# Altium PCB ESC_dev_board.PcbDoc
Units mil, origin at the board's own origin, x right, y up, seen from the top; angles counter-clockwise.
Board outline 2710 x 3135 mil, 2 copper layers (Top Layer, Bottom Layer); 51 components, 47 nets, 198 pads, 138 vias.
Unrouted connection lines stored in the file: 1.
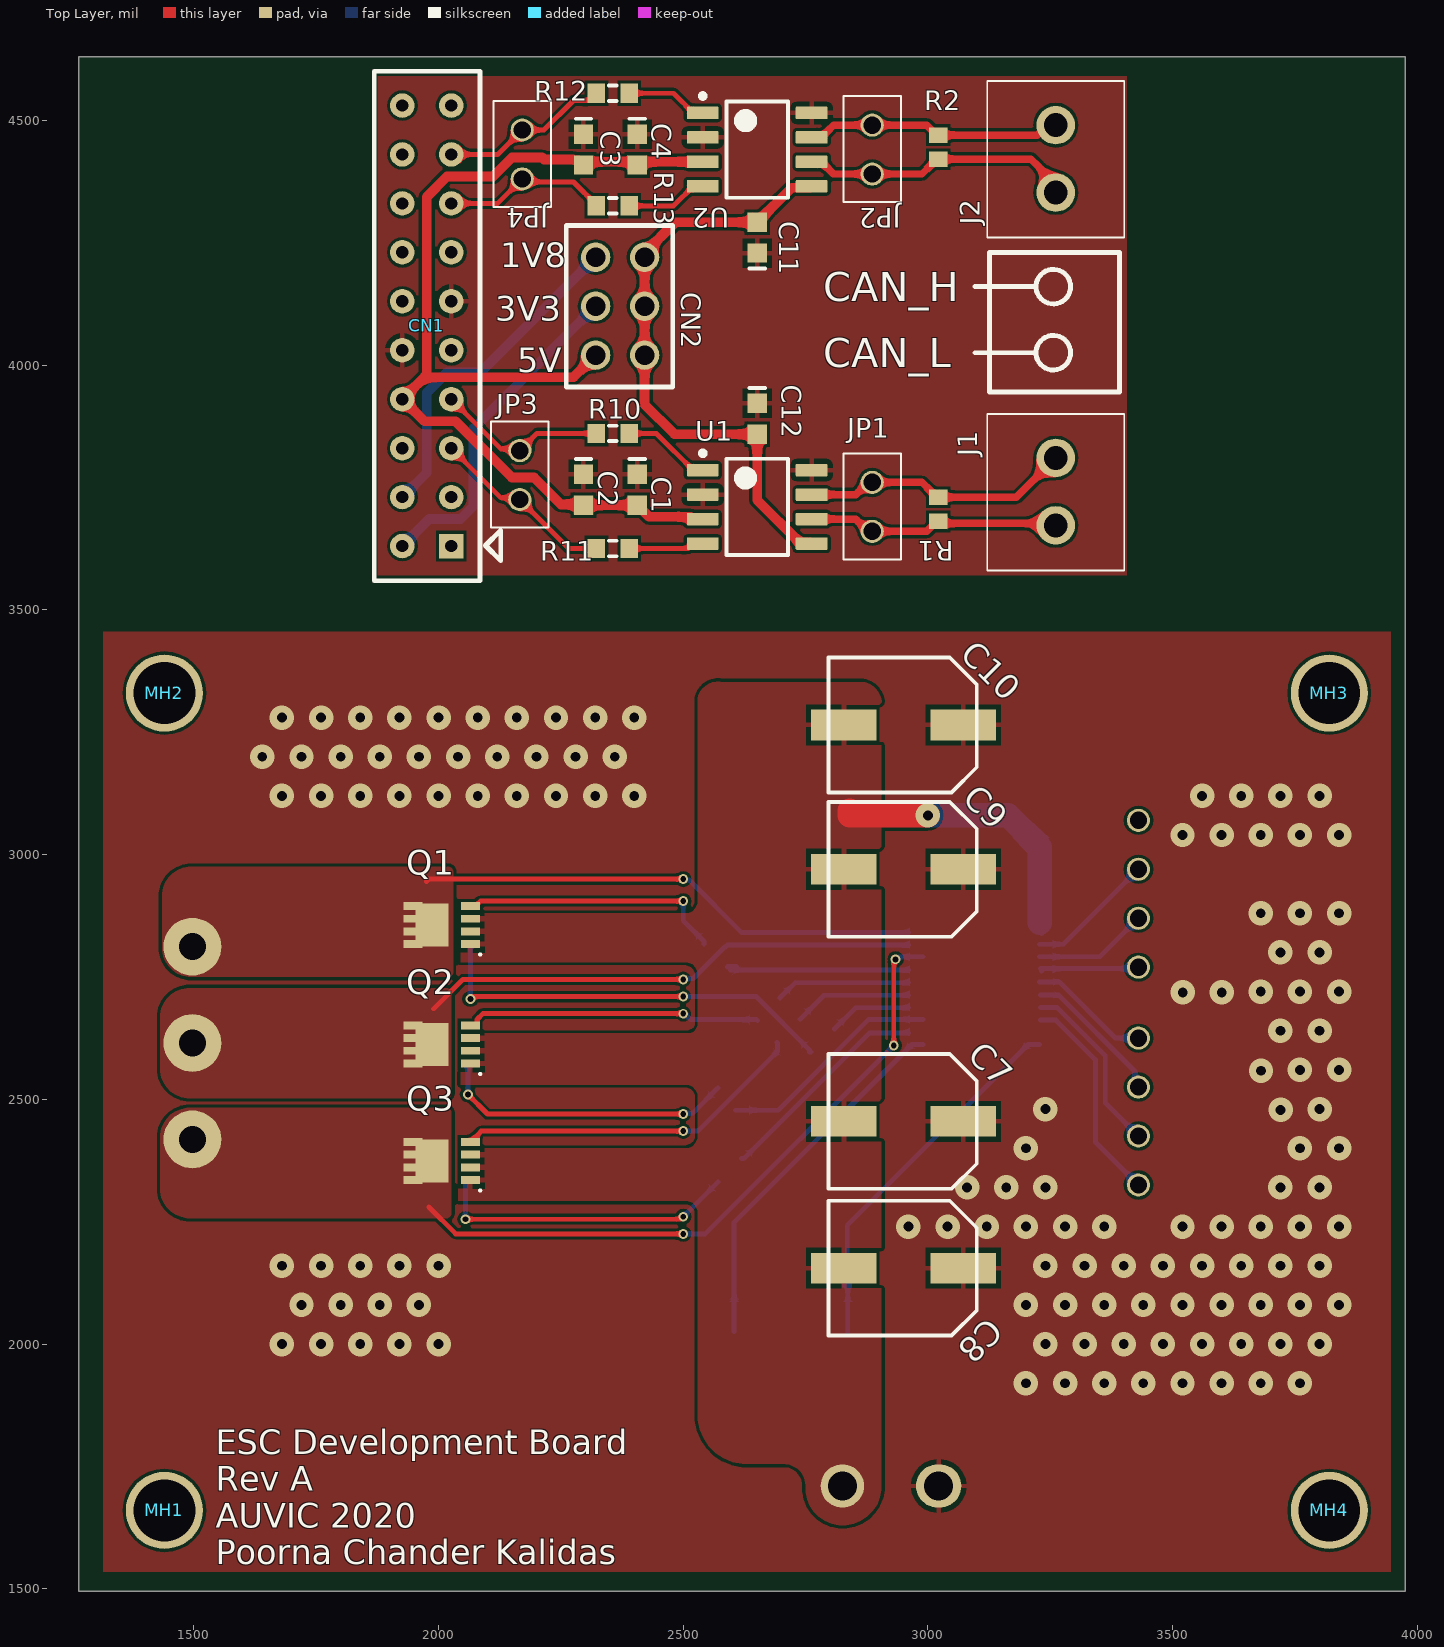
[diagram p0: Top Layer view]
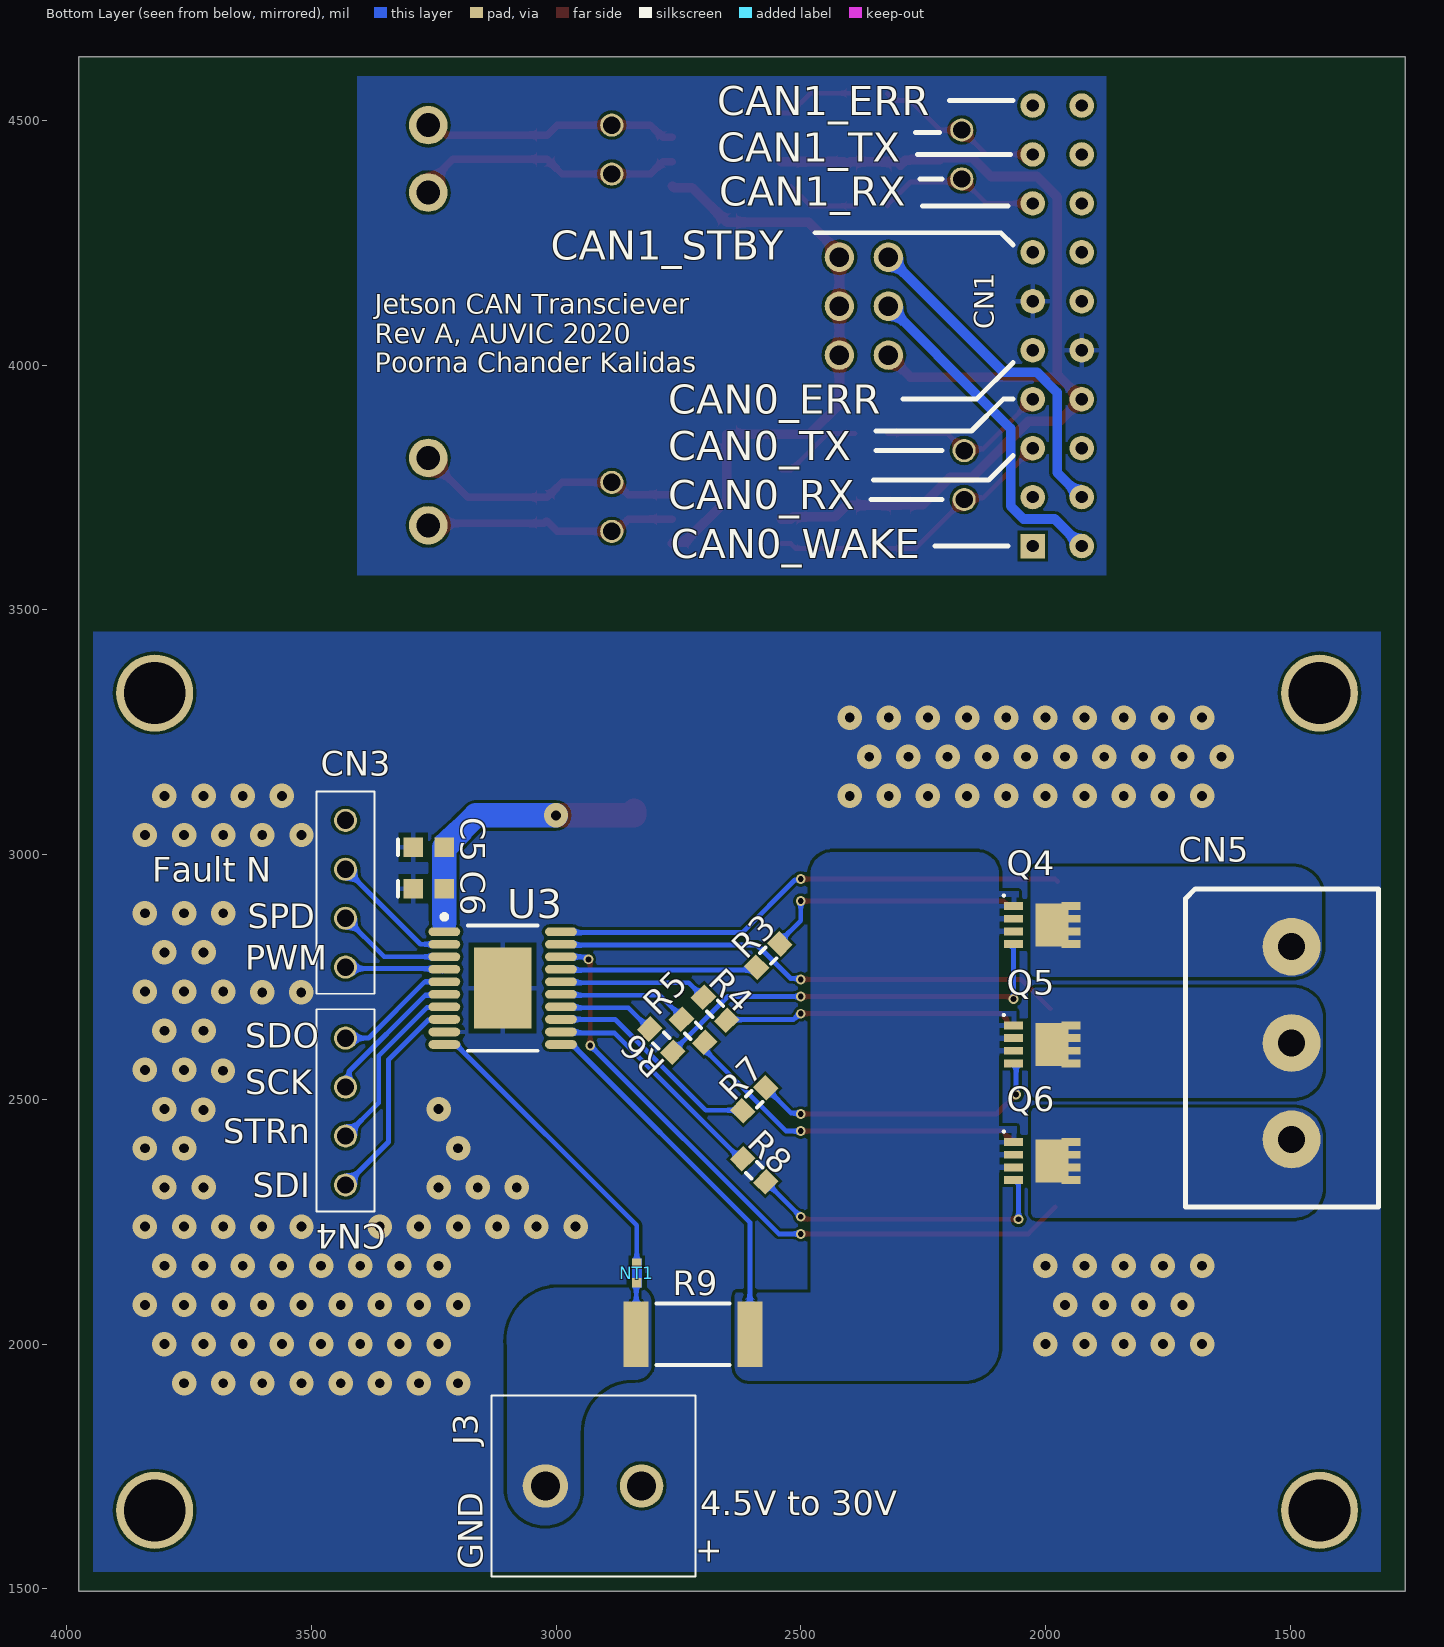
[diagram p1: Bottom Layer view, seen from below]

## Layer stack, top to bottom
Top Solder: solder mask 0.4, Solder Resist, Dk 3.5
Top Layer: signal copper 1.4
Dielectric 1: dielectric 12.6, FR-4, Dk 4.8
Bottom Layer: signal copper 1.4
Bottom Solder: solder mask 0.4, Solder Resist, Dk 3.5

## Board outline
1265,1495 3975,1495 3975,4630 1265,4630

## Design rules (kind name [scope] priority, off if disabled: settings)
Clearance [All] p1: gap=6 ignorepadtopadclearanceinfootprint=TRUE
DiffPairsRouting [All] p1: maxlimit=10 minlimit=10 mostfreqgap=10 toplayer_minwidth=15 toplayer_maxwidth=15 toplayer_prefwidth=15 bottomlayer_minwidth=15 bottomlayer_maxwidth=15 bottomlayer_prefwidth=15 maxuncoupledlength=500
PolygonConnect MotorPhaseA [All vs InNet('Phase_A_Out')] p1: connectstyle=Direct reliefconductorwidth=10 reliefentries=4 polygonreliefangle="90 Angle" airgapwidth=10
PolygonConnect SHUNT_HIGH_SIDE [All vs IsNamedPolygon('SHUNT_HIGH_SIDE')] p2: connectstyle=Direct reliefconductorwidth=10 reliefentries=4 polygonreliefangle="90 Angle" airgapwidth=10
PolygonConnect SHUNT_LOW_SIDE [All vs IsNamedPolygon('SHUNT_LOW_SIDE')] p3: connectstyle=Direct reliefconductorwidth=10 reliefentries=4 polygonreliefangle="90 Angle" airgapwidth=10
PolygonConnect NEG_BUS [All vs InNamedPolygon('NEG_BUS')] p4: thpad.connectstyle=Direct thpad.reliefconductorwidth=10 thpad.reliefentries=4 thpad.polygonreliefangle="90 Angle" thpad.airgapwidth=10 smdpad.connectstyle=Relief smdpad.reliefconductorwidth=10 smdpad.reliefentries=4 smdpad.polygonreliefangle="90 Angle" smdpad.airgapwidth=10 via.connectstyle=Direct via.reliefconductorwidth=10 via.reliefentries=4 via.polygonreliefangle="90 Angle" via.airgapwidth=10
PolygonConnect TOP_THERMAL_PAD [All vs IsNamedPolygon('TOP_THERMAL_PAD')] p5: connectstyle=Relief reliefconductorwidth=10 reliefentries=4 polygonreliefangle="90 Angle" airgapwidth=10
PolygonConnect Vin [All vs InNet('Vin')] p6: thpad.connectstyle=Direct thpad.reliefconductorwidth=10 thpad.reliefentries=4 thpad.polygonreliefangle="90 Angle" thpad.airgapwidth=10 smdpad.connectstyle=Relief smdpad.reliefconductorwidth=10 smdpad.reliefentries=4 smdpad.polygonreliefangle="90 Angle" smdpad.airgapwidth=10 via.connectstyle=Direct via.reliefconductorwidth=10 via.reliefentries=4 via.polygonreliefangle="90 Angle" via.airgapwidth=10
PolygonConnect MotorPhaseB [All vs InNet('Phase_B_Out')] p7: connectstyle=Direct reliefconductorwidth=10 reliefentries=4 polygonreliefangle="90 Angle" airgapwidth=10
PolygonConnect MotorPhaseC [All vs InNet('Phase_C_Out')] p8: connectstyle=Direct reliefconductorwidth=10 reliefentries=4 polygonreliefangle="90 Angle" airgapwidth=10
PolygonConnect [All] p9: thpad.connectstyle=Relief thpad.reliefconductorwidth=10 thpad.reliefentries=4 thpad.polygonreliefangle="90 Angle" thpad.airgapwidth=10 smdpad.connectstyle=Relief smdpad.reliefconductorwidth=10 smdpad.reliefentries=4 smdpad.polygonreliefangle="90 Angle" smdpad.airgapwidth=10 via.connectstyle=Direct via.reliefconductorwidth=10 via.reliefentries=4 via.polygonreliefangle="90 Angle" via.airgapwidth=10
RoutingVias [All] p1: holewidth=28 width=50 viastyle="Through Hole" minholewidth=28 minwidth=50 maxholewidth=28 maxwidth=50
SolderMaskExpansion [All] p1: expansion=4 istentingtop=FALSE
Width [All] p1: maxlimit=100 minlimit=10 preferedwidth=10
29 further rules are at their usual default settings.

## Classes and differential pairs
component class Jetson_CAN: C1 C2 C3 C4 C11 C12 CN1 CN2 J1 J2 JP1 JP2 JP3 JP4 R1 R2 R10 R11 R12 R13 U1 U2
component class ESC_dev_board: C5 C6 C7 C8 C9 C10 CN3 CN4 CN5 J3 MH1 MH2 MH3 MH4 NT1 Q1 Q2 Q3 Q4 Q5 Q6 R3 R4 R5 R6 R7 R8 R9 U3
differential pair CAN1: +CAN1_P -CAN1_N
differential pair CAN0: +CAN0_P -CAN0_N

## Components (designator, comment, footprint, x,y, rotation, side; value= is the part's Value field where it differs from the comment)
C1 "1μF" "CAPC1608N(0603\")" 2406.03,3745.44 r270 top
C2 "0.1μF" "CAPC1608N(0603\")" 2296.03,3745.44 r270 top
C3 "1μF" "CAPC1608N(0603\")" 2296.03,4440.44 r270 top
C4 "0.1μF" "CAPC1608N(0603\")" 2406.03,4440.44 r270 top
C5 "1μF" "CAPC1608N(0603\")" 3260,3015 r180 bottom
C6 "0.1uF, 50V, 10%, X7R, 0603" "CAPC1608N(0603\")" 3260,2930 r180 bottom
C7 "100µF" Radial_CAN_6.6mm 2950,2455 r0 top
C8 "100µF" Radial_CAN_6.6mm 2950,2155 r0 top
C9 "100µF" Radial_CAN_6.6mm 2950,2970 r0 top
C10 "100µF" Radial_CAN_6.6mm 2950,3265 r0 top
C11 "0.1μF" "CAPC1608N(0603\")" 2651.03,4260.44 r90 top
C12 "0.1μF" "CAPC1608N(0603\")" 2651.03,3890.44 r270 top
CN1 "Header Female 2x10" "HEADER, FEMALE/MALE, 2x10, 100mil" 2026.03,3630.44 r180 top
CN2 "Header, Male, 2x3, Pitch: 0.1\" (2.54mm), THT" "Header, Male, 2x3, Pitch: 0.1\" (2.54mm),THT" 2321.03,4120.44 r90 top
CN3 "Header Male 1x4" "Header, Male, 1X4" 3430,3070 r270 bottom
CN4 "Header Male 1x4" "Header, Male, 1X4" 3430,2625 r270 bottom
CN5 "3x1, Terminal Block, Pitch: 5mm, Screw, THT" "3x1, Terminal Block, Pitch: 5mm, Screw, THT" 1497.05,2615 r270 bottom
J1 "2x1 Term Block" "2X1 Terminal Blocks" 3261.03,3810.44 r270 top
J2 "2x1 Term Block" "2X1 Terminal Blocks" 3261.03,4490.44 r270 top
J3 "2x1 Term Block" "2X1 Terminal Blocks Phoenix Contact 5mm" 3021.85,1710 r180 bottom
JP1 "1X2 Pin Head" "2X1 Males Header" 2886.03,3760.44 r270 top
JP2 "1X2 Pin Head" "2X1 Males Header" 2886.03,4490.44 r270 top
JP3 "1X2 Pin Head" "2X1 Males Header" 2166.03,3825.44 r270 top
JP4 "1X2 Pin Head" "2X1 Males Header" 2171.03,4480.44 r270 top
MH1 "M3" Clearance_M3_PLATED 1440,1660 r90 top
MH2 "M3" Clearance_M3_PLATED 1440,3330 r90 top
MH3 "M3" Clearance_M3_PLATED 3820,3330 r90 top
MH4 "M3" Clearance_M3_PLATED 3820,1660 r90 top
NT1 "0.254mm x 0.508mm" NETTIE_20mil 2835,2164.37 r90 bottom net-tie
Q1 "SI7625DN-T1-GE3" "PowerPAK 1212-8" 2065,2817.05 r90 top locked
Q2 "SI7625DN-T1-GE3" "PowerPAK 1212-8" 2065,2573.03 r90 top locked
Q3 "SI7625DN-T1-GE3" "PowerPAK 1212-8" 2065,2335 r90 top locked
Q4 "SIS476DN-T1-GE3" "PowerPAK 1212-8" 2065,2895 r270 bottom locked
Q5 "SIS476DN-T1-GE3" "PowerPAK 1212-8" 2065,2650.98 r270 bottom locked
Q6 "SIS476DN-T1-GE3" "PowerPAK 1212-8" 2065,2412.83 r270 bottom locked
R1 "CRCW0603120KFKEA" RESC1609X50X30NL10T20 3021.03,3705.44 r270 top
R2 "CRCW0603120KFKEA" RESC1609X50X30NL10T20 3021.03,4445.44 r270 top
R3 "0R" "RESC1608N(0603\")" 2566.34,2793.66 r135 bottom
R4 "0R" "RESC1608N(0603\")" 2675,2685 r225 bottom
R5 "0R" "RESC1608N(0603\")" 2720,2640 r225 bottom
R6 "0R" "RESC1608N(0603\")" 2785,2620 r225 bottom
R7 "0R" "RESC1608N(0603\")" 2595,2500 r135 bottom
R8 "0R" "RESC1608N(0603\")" 2595,2355 r225 bottom
R9 "0.01" "RESC6332N(2512\")" 2720,2020 r180 bottom
R10 "1k" "RESC1608N(0603\")" 2356.03,3860.44 r0 top
R11 "1k" "RESC1608N(0603\")" 2356.03,3625.44 r0 top
R12 "1k" "RESC1608N(0603\")" 2356.03,4555.44 r0 top
R13 "1k" "RESC1608N(0603\")" 2356.03,4325.44 r0 top
U1 "TJA1042T/3,118" 8-SOIC 2651.03,3710.44 r0 top
U2 "TJA1042T/3,118" 8-SOIC 2651.03,4440.44 r0 top
U3 "A4963" TSOP65P640X120_HS-21M 3108.99,2727.19 r180 bottom

## Footprints (in the part's own frame and the unit in brackets; to place one, negate y for a bottom-side part, rotate by r counter-clockwise, add the part's x,y. Pads: shape width x height; smd on the part's side, far side on the other; paste and mask are expansions set on the pad)
"2X1 Males Header" [mm]
  round 1.2 hole 0.9: 1(0,0) 2(2.54,0)
  silkscreen extent -1.5,-1.5 4,1.5, body extent -1.55,-1.55 4.05,1.55, height 1.27
"2X1 Terminal Blocks" [mm] "ED2740-ND"
  round 2 hole 1.24: 1(0,0) 2(3.5,0)
  silkscreen extent -2.29,-3.56 5.84,3.56, body extent -2.34,-3.61 5.89,3.61, height 1.27
"2X1 Terminal Blocks Phoenix Contact 5mm" [mm]
  oval 2.35x2.25 hole 1.5: 1(0,0)
  round 2.25 hole 1.5: 2(5,0)
  silkscreen extent -2.8,-4.7 7.8,4.7, body extent -2.85,-4.75 7.85,4.75, height 13.5
"3x1, Terminal Block, Pitch: 5mm, Screw, THT" [mm]
  round 3 hole 1.4: 1(-5,0) 2(0,0) 3(5,0)
  silkscreen extent -8,-5.5 8.5,4.5, body extent -8.63,-6.13 9.13,5.13, height 1.27
8-SOIC [mm] "SOIC, 8-Leads, Body 5x4mm, Pitch 1.27mm, IPC Low Density"
  rrect15% 1.65x0.65 smd: 1(-2.825,1.905) 2(-2.825,0.635) 3(-2.825,-0.635) 4(-2.825,-1.905) 5(2.825,-1.905) 6(2.825,-0.635) 7(2.825,0.635) 8(2.825,1.905)
  silkscreen extent -2.95,-2.5 1.6,2.9, body extent -4.18,-3.02 4.17,3.03, height 1.75
"CAPC1608N(0603\")" [mm] "Chip Capacitor, Body 1.6x0.8mm (0603\"), IPC Medium Density"
  rect 1x1 smd: 1(-0.8,0) 2(0.8,0)
  silkscreen extent -1.6,-0.4 -1.6,0.4, body extent -1.7,-0.8 1.6,0.8, height 0.85
Clearance_M3_PLATED [mm]
  round 4 hole 3.2: 1(0,0)
  body extent -3.13,-3.13 3.13,3.13, height 1.27
"HEADER, FEMALE/MALE, 2x10, 100mil" [mil]
  rect 50x50 hole 25: 1(0,0)
  round 50 hole 25: 2(100,0) 3(0,-100) 4(100,-100) 5(0,-200) 6(100,-200) 7(0,-300) 8(100,-300) 9(0,-400) 10(100,-400) 11(0,-500) 12(100,-500) 13(0,-600) 14(100,-600) 15(0,-700) 16(100,-700) 17(0,-800) 18(100,-800) 19(0,-900) 20(100,-900)
  silkscreen extent -101,-970 157,71, body extent -106,-975 162,76, height 50
"Header, Male, 1X4" [mm]
  round 1.2 hole 0.9: 1(0,0) 2(2.54,0) 3(5.08,0) 4(7.62,0)
  silkscreen extent -1.5,-1.5 9,1.5, body extent -1.55,-1.55 9.05,1.55, height 11.29
"Header, Male, 2x3, Pitch: 0.1\" (2.54mm),THT" [mil]
  round 60 hole 40: 1(-100,0) 2(0,0) 3(100,0) 4(100,-100) 5(0,-100) 6(-100,-100)
  silkscreen extent -165,-157 165,60, body extent -170,-162 170,65, height 50
NETTIE_20mil [mil]
  rect 20x20 smd: 1(-39.37,0) 2(0,0)
  Top Layer region: -49.31,9.95 10,9.95 10,-10.25 -49.31,-10.25
  body extent -53,-14 14,14, height 50
"PowerPAK 1212-8" [mm] "PowerPAK MOSFET Package"
  rect 0.405x0.99 smd: 1(0,0) 2(0.66,0) 3(1.32,0) 4(1.98,0) 5(1.98,2.985) 6(1.32,2.985) 7(0.66,2.985) 8(0,2.985)
  rect 2.235x1.725 smd: 9(0.99,1.993)
  silkscreen extent -0.64,-0.61 -0.44,-0.41, body extent -0.85,-0.61 2.85,3.58, height 1
Radial_CAN_6.6mm [mm] "Radial Electrolytic Can, 8.3mm Radius, 10.5mm Height"
  rect 3.4x1.6 smd: 1(-3.1,0) 2(3.1,0)
  silkscreen extent -3.9,-3.5 3.8,3.5, body extent -4.9,-3.6 4.9,3.6, height 1.27
"RESC1608N(0603\")" [mm] "Chip Resistor, Body 1.6x0.8mm (0603\"), IPC Medium Density"
  rect 0.9x1 smd: 1(-0.85,0) 2(0.85,0)
  silkscreen extent -0.2,-0.4 0.2,0.4, body extent -1.6,-0.8 1.6,0.8, height 0.6
RESC1609X50X30NL10T20 [mm] "Chip Resistor, 2-Leads, Body 1.55x0.85mm, IPC Medium Density"
  rect 0.8x0.95 smd: 1(-0.625,0) 2(0.625,0)
  body extent -1.32,-0.77 1.32,0.77, height 0.5
"RESC6332N(2512\")" [mm] "Chip Resistor, Body 6.3x3.2mm (2512\"), IPC Medium Density"
  rect 1.3x3.4 smd: 1(-2.95,0) 2(2.95,0)
  silkscreen extent -1.9,-1.6 1.9,1.6, body extent -3.9,-2 3.9,2, height 0.71
TSOP65P640X120_HS-21M [mm] "TSOP, 20-Leads, Body 6.50x4.40mm, Pitch 0.65mm, Thermal Pad 4.20x3.00mm, IPC Low Density"
  oval 1.65x0.45 smd: 1(-3.025,2.925) 2(-3.025,2.275) 3(-3.025,1.625) 4(-3.025,0.975) 5(-3.025,0.325) 6(-3.025,-0.325) 7(-3.025,-0.975) 8(-3.025,-1.625) 9(-3.025,-2.275) 10(-3.025,-2.925) 11(3.025,-2.925) 12(3.025,-2.275) 13(3.025,-1.625) 14(3.025,-0.975) 15(3.025,-0.325) 16(3.025,0.325) 17(3.025,0.975) 18(3.025,1.625) 19(3.025,2.275) 20(3.025,2.925)
  rect 3x4.2 smd: 21(0,0)
  silkscreen extent -3.15,-3.25 1.8,3.82, body extent -3.2,-3.25 3.2,3.25, height 1.2

## Part data
C1 C3 C5: library part "1uF 50V 0603 SMD, Ceramic", "Capacitor, Ceramic, 50V, +/- 10%, 0603 SMD, X5R", Supplier Part Number 1=1276-1860-6-ND, Created By="Lyden Smith", Date Created=2017-10-26, PackageDescription="Chip Capacitor", Supplier 1=Digi-Key
C2 C4 C11 C12: library part "0.1uF 16V 0603 SMD, Ceramic", "Capacitor, Ceramic, 16V, +/- 10%, 0603 SMD, X7R", Supplier Part Number 1=1276-1005-1-ND, Created By="Andy Bates", PackageDescription="Chip Capacitor", Published=16-04-26, Publisher=AUVic, Supplier 1=Digi-Key
C6: "0.1µF ±20% Ceramic Capacitor X7R 0603 (1608 Metric)", Capacitance=0.1µF, Operating Temperature="-55°C ~ 125°C", Package / Case="0603 (1608 Metric)", Supplier Part Number 1=445-5098-1-ND, ComponentLink1Description=Digi-Key, ComponentLink1URL=https://www.digikey.ca/product-detail/en/tdk-corporation/C1608X7R1H104M080AA/445-5098-1-ND/2093713, Created By="Poorna Chander Kalidas", Mounting Type="Surface Mount, MLCC", Supplier 1=Digi-Key
C7 C8 C9 C10: library part "100uF, 35V, 20%, 30mOhm, Alum, SMD", "100µF 35V Aluminum Polymer Capacitor Radial, Can - SMD 30mOhm 2000 Hrs @ 105°C", Supplier Part Number 1=732-11942-1-ND, Created By="Poorna Chander Kalidas", Date Created=2020-02-15, PackageDescription=Can, Supplier 1=Digi-Key
CN1: library part "Header, Female/Male, 2x10, THT, 100mil", "Header, Female with extended Male pins, 2x10, THT, 100mil", Supplier Part Number 1=SAM1204-10-ND, Created By="Poorna Chander Kalidas", Supplier 1=Digi-Key
CN3 CN4: library part "Header, Male, 1x4", "1x4, Pads Pitch: 0.1\" (2.54mm), Through hole", Supplier 1 Part Number=952-2266-ND, Made Bates="Andy Bates", Supplier 1=Digikey
CN5: Supplier Part Number 1=277-1578-ND, Date Published=2014-06-03, Publisher="AUVic, Ashwin Sira", Supplier 1=Digi-Key
J1 J2: library part "2x1 Terminal Block", Supplier Part Number 1=ED2740-ND, Made By="Andy Bates", Supplier 1=Digikey
J3: library part "2x1 Terminal Block, 20A, 12-20AWG", Supplier Part Number 1=277-6405-ND, Date Made=2017-11-14, Made By="Andy Bates", Supplier 1=Digi-Key
JP1 JP2 JP3 JP4: library part "1x2 Male Header", Supplier 1 Part Number=952-3073-ND, Made By="Andy Bates", Supplier 1=Digikey
MH1 MH2 MH3 MH4: library part "Mounting Hole, M3, Plated", "Mounting Hole, M3, Plated", Created By="Ashwin Sira", Date Created=2016-06-08, Publisher=AUVic
NT1: library part "Net Tie, 20mil", "Net Tie, 20mil by 20mil", Created By="Ashwin Sira", Date Created=2016-06-17, Publisher=AUVic, Size="0.254mm x 0.508mm"
Q1 Q2 Q3: "P-Channel 30V 35A (Tc) 3.7W (Ta), 52W (Tc) Surface Mount PowerPAK® 1212-8", Supplier Part Number 1=SI7625DN-T1-GE3CT-ND, Created By="Poorna Chander Kalidas", Supplier 1=Digi-Key
Q4 Q5 Q6: "N-Channel 30V 40A (Tc) 3.7W (Ta), 52W (Tc) Surface Mount PowerPAK® 1212-8", Supplier Part Number 1=SIS476DN-T1-GE3CT-ND, ComponentLink1Description=Digi-Key, ComponentLink1URL=https://www.digikey.ca/product-detail/en/diodes-incorporated/DMN3023L-7/DMN3023L-7DICT-ND/5453155, Created By="Poorna Chander Kalidas", Supplier 1=Digi-Key
R1 R2: library part CMP-2000-03868-1, Manufacturer="Vishay Dale", Part Number=CRCW0603120KFKEA
R3 R4 R5 R6 R7 R8: library part "0R, 1%, 1/10W, 0603 SMD", "0R, 1%, 1/10W, 0603 SMD", Supplier Part Number 1=311-0.0GRCT-ND, Created On=14-05-31, Last Edited=14-05-31, Made By="Ashwin Sira", Owned By=AUVic, Supplier 1=Digi-Key
R9: library part "0R01, 1%, 3W, 2512 SMD", "RES 0.01 OHM 1% 3W 2512", Supplier Part Number 1=CRA2512-FZ-R010ELFCT-ND, Created By="Poorna Chander Kalidas", Created On=2020-02-15, Supplier 1=Digi-Key
R10 R11 R12 R13: library part "1kR, 1%, 1/10W , 0603, SMD", "1kR, 1%, 1/10W , 0603, SMD", Supplier Part Number 1=311-1.00KHRCT-ND, Created By="Andy Bates", Date Created=2017-05-10, Publisher=AUVic, Supplier 1=Digikey
U1 U2: library part "CAN Transceiver", "1/1 Transceiver Half CANbus 8-SO", Supplier Part Number 1=568-8678-1-ND, ComponentLink1Description=Digikey, ComponentLink1URL=https://www.digikey.ca/product-detail/en/texas-instruments/SN65HVD232DR/296-26344-1-ND/2254978, Made By="Poorna Chander Kalidas", Supplier 1=Digi-Key
U3: library part "A4963, BLDC, 3Phase", "A4963, BLDC, 3 Phase, Sensorless", Supplier Part Number 1=620-1686-1-ND, Created By="Poorna Chander Kalidas", Supplier 1=Digi-Key
CN2: Created By="Andy Bates", Date Published=2017-09-13, Publisher=AUVic

## Via types
v1: diameter 50, hole 20, Top Layer to Bottom Layer, 124 vias
v2: diameter 20, hole 12, Top Layer to Bottom Layer, 14 vias

## Nets (pads, with @x,y where several pads share a name; then routed paths per layer and width w, separated by ;. In a path a pad name is that pad's centre, name@x,y a point inside that pad or via, vN(x,y) a via of type N, cw(c..) or ccw(c..) an arc to the next point about the centre after c; other vN are vias at no path point)
1V8: CN1.4 CN2.3 | length 693.8
  Bottom Layer w20: CN1.4 1976.03,3780.44 1976.03,3944.08 2017.39,3985.44 2086.03,3985.44 CN2.3
3V3: CN1.2 CN2.2 | length 690.9
  Bottom Layer w20: CN1.2 1981.03,3685.44 2044.67,3685.44 2071.03,3711.8 2071.03,3870.44 2122.41,3921.82 CN2.2
5V: C1.2 C2.2 C3.2 C4.2 CN1.8 CN2.1 U1.3 U2.3 | length 2115.3
  Top Layer w20: C3.2 2286.34,4418.63 2276.44,4418.63 2274.63,4420.44 2215.72,4420.44 2212.09,4424.06 2150.01,4424.06 2111.38,4385.44 2017.39,4385.44 1976.03,4344.08 1976.03,3980.44 1971.03,3975.44 ; C3.2@2302.53,4415.44 2399.53,4415.44 C4.2 2412.53,4415.44 U2.3 ; CN2.1 2276.03,3975.44 1971.03,3975.44 ; C1.2@2401.03,3713.95 C2.2 2294.53,3715.44 2250.38,3715.44 2195.38,3770.44 2149.67,3770.44 2034.67,3885.44 1971.03,3885.44 CN1.8 1971.03,3975.44 ; C1.2 2429.53,3690.44 2515.12,3690.44 2520.12,3685.44 U1.3
CAN0_ERR: CN1.9
CAN0_N: J1.2 JP1.2 R1.2 U1.6 | length 521
  Top Layer w15: U1.6 2852.3,3685.44 2877.3,3660.44 JP1.2 2997.68,3660.44 3018.08,3680.84 R1.2 3025.12,3676.74 3256.93,3676.74 J1.2
CAN0_P: J1.1 JP1.1 R1.1 U1.7 | length 555
  Top Layer w15: U1.7 2852.3,3735.44 2877.3,3760.44 JP1.1 2987.68,3760.44 3018.08,3730.05 R1.1 3180.64,3730.05 J1.1
CAN0_RX: CN1.5 JP3.2 R11.1 | length 381.4
  Top Layer w10: CN1.5 2127.41,3729.06 2162.41,3729.06 JP3.2 2266.03,3625.44 R11.1
CAN0_STBY: CN1.3
CAN0_TX: CN1.7 JP3.1 R10.1 | length 354.5
  Top Layer w10: CN1.7 2127.41,3829.06 2162.41,3829.06 JP3.1 2201.03,3860.44 R10.1
CAN1_ERR: CN1.19
CAN1_N: J2.2 JP2.2 R2.2 U2.6 | length 560.9
  Top Layer w15: U2.6 2781.93,4415.44 2806.15,4391.23 2806.15,4390.44 JP2.2 2987.68,4390.44 3018.08,4420.84 R2.2 3210.64,4420.84 3226.03,4405.44 3226.03,4404.89 3261.03,4369.89 J2.2
CAN1_P: J2.1 JP2.1 R2.1 U2.7 | length 526
  Top Layer w15: U2.7 2781.93,4465.44 2806.93,4490.44 JP2.1 2997.68,4490.44 3018.08,4470.05 3223.39,4470.05 3243.78,4490.44 J2.1
CAN1_RX: CN1.15 JP4.2 R13.1 | length 341.2
  Top Layer w10: CN1.15 2121.03,4330.44 JP4.2 2177.21,4374.26 2275.71,4374.26 2322.57,4327.41 R13.1
CAN1_STBY: CN1.13
CAN1_TX: CN1.17 JP4.1 R12.1 | length 349.5
  Top Layer w10: CN1.17 2121.03,4430.44 JP4.1 2215.32,4480.44 2275.64,4540.76 2309.85,4540.76 2322.57,4553.47 R12.1
CAN_WAKE: CN1.1
Current_Shunt_H: Q4.1 Q4.2 Q4.3 Q5.1 Q5.2 Q5.3 Q6.1 Q6.2 Q6.3 R9.2 U3.11 | length 760.2
  Bottom Layer w10: R9.2@2603.86,2025 2603.86,2248.5 2967.4,2612.05 U3.11@2990,2612.05
Current_Shunt_L: NT1.2 U3.10 | length 624.4
  Bottom Layer w10: NT1.2 2835,2242.48 3204.57,2612.05 U3.10@3228.19,2612.05
Fault_N: CN3.2 U3.2 | length 265.3
  Bottom Layer w10: U3.2@3228.19,2816.77 3276.77,2816.77 CN3.2
GHA: R3.1 U3.17 | length 383.8
  Bottom Layer w10: R3.1 2591.39,2771.39 R3.1@2609.38,2771.39 ; R3.1@2596.18,2763.82 U3.17@2960,2763.82
GHB: R4.1 U3.16 | length 275.1
  Bottom Layer w10: R4.1@2697.73,2707.27 2728.69,2738.23 U3.16@2960,2738.23
GHC: R5.1 U3.15 | length 241.6
  Bottom Layer w10: R5.1@2738.66,2663.66 2787.64,2712.64 U3.15@2960,2712.64
GLA: R6.1 U3.14 | length 169.3
  Bottom Layer w10: R6.1 2852.05,2687.05 U3.14@2960,2687.05
GLB: R7.1 U3.13 | length 459.9
  Bottom Layer w10: R7.1@2606.93,2477.73 2693.86,2477.73 2879.36,2663.23 U3.13@2990,2663.23
GLC: R8.1 U3.12 | length 447.9
  Bottom Layer w10: R8.1 2623.66,2378.66 2880.87,2635.87 U3.12@2960,2635.87
GND: C1.1 C2.1 C3.1 C4.1 C5.1 C6.1 C7.2 C8.2 C9.2 C10.2 C11.1 C12.1 CN1.10 CN1.11 J3.1 NT1.1 R9.1 U1.2 U1.8 U2.2 U2.8 U3.9 U3.21 | length 105.7
  Bottom Layer w10: NT1.1 cw(c2835,2123.86) 2836.14,2123.86 R9.1
  other v1: 3200,1920 3280,1920 3360,1920 3440,1920 3520,1920 3600,1920 3680,1920 3760,1920 1680,2000 1760,2000 1840,2000 1920,2000 2000,2000 3240,2000 3320,2000 3400,2000 3480,2000 3560,2000 3640,2000 3720,2000 3800,2000 1720,2080 1800,2080 1880,2080 1960,2080 3200,2080 3280,2080 3360,2080 3440,2080 3520,2080 3600,2080 3680,2080 3760,2080 3840,2080 1680,2160 1760,2160 1840,2160 1920,2160 2000,2160 3240,2160 3320,2160 3400,2160 3480,2160 3560,2160 3640,2160 3720,2160 3800,2160 2960,2240 3040,2240 3120,2240 3200,2240 3280,2240 3360,2240 3520,2240 3600,2240 3680,2240 3760,2240 3840,2240 3080,2320 3160,2320 3240,2320 3720,2320 3800,2320 3200,2400 3760,2400 3840,2400 3720.4,2478.32 3240,2480 3800,2480 3680.4,2558.32 3760,2560 3840,2560 3720,2640 3800,2640 3520.4,2718.32 3600.4,2718.32 3680,2720 3760,2720 3840,2720 3720,2800 3800,2800 3680,2880 3760,2880 3840,2880 3520,3040 3600,3040 3680,3040 3760,3040 3840,3040 1680,3120 1760,3120 1840,3120 1920,3120 2000,3120 2080,3120 2160,3120 2240,3120 2320,3120 2400,3120 3560,3120 3640,3120 3720,3120 3800,3120 1640,3200 1720,3200 1800,3200 1880,3200 1960,3200 2040,3200 2120,3200 2200,3200 2280,3200 2360,3200 1680,3280 1760,3280 1840,3280 1920,3280 2000,3280 2080,3280 2160,3280 2240,3280 2320,3280 2400,3280
NetQ1_4: Q1.4 R3.2 | length 545.2
  Top Layer w10: Q1.4 2076.52,2895 2079.49,2897.97 2079.49,2899.14 2085.35,2905 v2(2500,2905)
  Bottom Layer w10: v2(2500,2905) 2500,2865 2542.67,2822.33 R3.2
NetQ2_4: Q2.4 R4.2 | length 607.9
  Top Layer w10: Q2.4 2076.52,2650.98 2079.49,2653.96 2079.49,2664.14 2090.35,2675 v2(2500,2675)
  Bottom Layer w10: v2(2500,2675) 2502.71,2675 2514.98,2662.73 2649.95,2662.73 R4.2
NetQ3_4: Q3.4 R5.2 | length 723
  Top Layer w10: Q3.4 2087.05,2435 v2(2500,2435)
  Bottom Layer w10: v2(2500,2435) 2529.85,2435 2692.27,2597.42 2692.27,2615.4 R5.2@2691.34,2616.34
NetQ4_4: Q4.4 R6.2 | length 864.7
  Top Layer w10: v2(2065,2705) 2070,2710 v2(2500,2710)
  Bottom Layer w10: v2(2065,2705) 2065,2807.41 2070,2812.41 2065.36,2817.05 Q4.4 ; v2(2500,2710) 2648.94,2710 2757.73,2601.21 2757.73,2596.34 R6.2
NetQ5_4: Q5.4 R7.2 | length 617.8
  Top Layer w10: v2(2060,2510) 2100,2470 v2@2499.9,2470
  Bottom Layer w10: v2(2060,2510) 2060,2568.03 Q5.4 ; v2@2502.71,2470 v2(2500,2470) 2501.91,2471.91 2519.59,2471.91 2569.95,2522.27 R7.2
NetQ6_4: Q6.4 R8.2 | length 633.2
  Top Layer w10: v2(2055,2255) 2495,2255 v2(2500,2260)
  Bottom Layer w10: v2(2055,2255) 2055,2326.91 2062.97,2334.88 Q6.4 ; v2(2500,2260) R8.2
NetR10_2: R10.2 U1.1 | length 181.4
  Top Layer w10: R10.2 2445.12,3860.44 2520.12,3785.44 U1.1
NetR11_2: R11.2 U1.4 | length 154.5
  Top Layer w10: R11.2 2510.12,3625.44 2520.12,3635.44 U1.4
NetR12_2: R12.2 U2.1 | length 166.9
  Top Layer w10: R12.2 2480.12,4555.44 2520.12,4515.44 U2.1
NetR13_2: R13.2 U2.4 | length 166.9
  Top Layer w10: R13.2 2480.12,4325.44 2520.12,4365.44 U2.4
Phase_A_Out: CN5.1 Q1.5 Q1.6 Q1.7 Q1.8 Q1.9 Q4.5 Q4.6 Q4.7 Q4.8 Q4.9 U3.20 | length 1032.5
  Top Layer w10: Q1.5 Q1.5 ; 1975,2945 1980,2950 v2(2500,2950)
  Bottom Layer w10: v2(2500,2950) 2501.91,2948.09 2511.91,2948.09 2619.41,2840.59 U3.20@2960,2840.59
Phase_B_Out: CN5.2 Q2.5 Q2.6 Q2.7 Q2.8 Q2.9 Q5.5 Q5.6 Q5.7 Q5.8 Q5.9 U3.19 | length 1023.8
  Top Layer w10: 1990,2685 2050,2745 v2(2500,2745)
  Bottom Layer w10: v2(2500,2745) 2501.87,2746.87 2520.6,2746.87 2585.18,2811.45 2586.45,2811.45 2590,2815 U3.19@2960,2815
Phase_C_Out: CN5.3 Q3.5 Q3.6 Q3.7 Q3.8 Q3.9 Q6.5 Q6.6 Q6.7 Q6.8 Q6.9 U3.18 | length 1389.4
  Top Layer w10: 1980,2280 2035,2225 v2(2500,2225) ; Q3.9 Q3.9@2000,2360.53 ; v2(2930,2610) v2@2930,2790
  Bottom Layer w10: v2(2500,2225) 2545,2225 v2(2930,2610) ; v2(2933.89,2785.98) 2936.6,2785.98 2941.78,2791.17 U3.18
PWM: CN3.4 U3.4 | length 203.6
  Bottom Layer w10: U3.4@3229.67,2767.07 3427.07,2767.07 CN3.4 ; U3.4@3232.08,2761.57 U3.4@3233.56,2763.05
SCK: CN4.2 U3.6 | length 292.7
  Bottom Layer w10: U3.6@3229.67,2712.93 3266.82,2712.93 3422.87,2556.88 3422.87,2532.13 CN4.2
SDI: CN4.4 U3.8 | length 438.3
  Bottom Layer w10: U3.8@3229.67,2661.75 3261.44,2661.75 3342.16,2581.03 3342.16,2412.84 CN4.4
SDO: CN4.1 U3.5 | length 249.4
  Bottom Layer w10: U3.5@3228.19,2740 3268.04,2740 3383.04,2625 CN4.1
SPD: CN3.3 U3.3 | length 234.5
  Bottom Layer w10: U3.3@3228.19,2791.18 3351.18,2791.18 CN3.3
STRn: CN4.3 U3.7 | length 365.5
  Bottom Layer w10: U3.7@3229.67,2687.34 3264.13,2687.34 3362.16,2589.32 3362.16,2492.84 CN4.3
Vin: C5.2 C6.2 C7.1 C8.1 C9.1 C10.1 J3.2 Q1.1 Q1.2 Q1.3 Q2.1 Q2.2 Q2.3 Q3.1 Q3.2 Q3.3 U3.1 | length 592.6
  Top Layer w10: Q1.1 Q1.1@2076.52,2817.05
  Top Layer w50: 2840,3090 2840,3080 v1(3000,3080)
  Bottom Layer w10: U3.1@3232.08,2838.35 U3.1@3232.99,2839.25
  Bottom Layer w50: v1(3000,3080) 3163.5,3080 C5.2 C6.2 3228.5,2866.33 cw(c3178.5,2866.23) 3228.19,2860.63
VIO: C11.2 C12.2 CN2.4 CN2.5 CN2.6 U1.5 U2.5 | length 1245
  Top Layer w20: U1.5 2759.45,3638.24 2737.02,3638.24 2651.03,3724.23 C12.2 2481.98,3858.95 2421.03,3919.89 CN2.6 CN2.5 2421.03,4229.28 2483.69,4291.94 C11.2 2721.74,4362.65 2759.45,4362.65 U2.5
pads on no net: CN1.6 CN1.12 CN1.14 CN1.16 CN1.18 CN1.20 CN3.1 MH1.1 MH2.1 MH3.1 MH4.1

## Polygon pours and split planes (outlines as drawn)
GND on Top Layer "GND_TOP" (solid, pour order 95): 3945,1535 1315,1535 1315,3455 3945,3455
GND on Top Layer "NONET_L01_P-001" (solid, pour order 78): 1876.03,4590.44 1876.03,3570.44 3406.03,3570.44 3406.03,4590.44
Vin on Top Layer "Top Layer-Vin" (solid, pour order 75): 2040,2292.5 2267.5,2292.5 2505,2292.5 cw(c2505,2267.5) 2530,2267.5 2530,2190 2530,1855 ccw(c2630,1855) 2630,1755 2705,1755 cw(c2705,1710) 2750,1710 2750,1705 ccw(c2825,1705) 2825,1630 ccw(c2825,1710) 2905,1710 2905,2210 2905,3300 ccw(c2860,3307.5) 2867.5,3352.5 2580,3352.5 ccw(c2571.25,3311.25) 2530,3320 2530,2905 cw(c2505,2905) 2505,2880 2045,2880 2045,2780 2505,2780 cw(c2505,2755) 2530,2755 2530,2655 cw(c2510,2655) 2510,2635 2045,2635 2045,2530 2505,2530 cw(c2505,2505) 2530,2505 2530,2425 cw(c2505,2425) 2505,2400 2040,2400
Phase_A_Out on Top Layer "PHASE_A_OUT_L01_P069" (solid, pour order 69): 1495,2750 cw(c1495,2810) 1435,2810 1435,2915 cw(c1495,2915) 1495,2975 2020,2975 cw(c2020,2965) 2030,2965 2030,2760 cw(c2020,2760) 2020,2750
Phase_C_Out on Top Layer "PHASE_C_OUT_L01_P071" (solid, pour order 71): 1491.43,2257.41 cw(c1491.43,2317.41) 1431.43,2317.41 1431.43,2422.41 cw(c1491.43,2422.41) 1491.43,2482.41 2016.43,2482.41 cw(c2016.43,2472.41) 2026.43,2472.41 2026.43,2267.41 cw(c2016.43,2267.41) 2016.43,2257.41
Phase_B_Out on Top Layer "PHASE_B_OUT_L01_P070" (solid, pour order 70): 1491.43,2502.41 cw(c1491.43,2562.41) 1431.43,2562.41 1431.43,2667.41 cw(c1491.43,2667.41) 1491.43,2727.41 2016.43,2727.41 cw(c2016.43,2717.41) 2026.43,2717.41 2026.43,2512.41 cw(c2016.43,2512.41) 2016.43,2502.41
no net on Top Layer "NONET_L01_P058" (solid, pour order 58): 2905,2210
no net on Top Layer "NONET_L01_P043" (solid, pour order 43): 1950,1025
no net on Top Layer "NONET_L01_P041" (solid, pour order 41): 1917.68,1252.68
no net on Top Layer "NONET_L01_P040" (solid, pour order 40): 1910,1235
no net on Top Layer "NONET_L01_P039" (solid, pour order 39): 1950,1225
no net on Top Layer "NONET_L01_P001" (solid, pour order 1): 1250,1755
GND on Bottom Layer "GND_BOTTOM" (solid, pour order 96): 3945,3455 1315,3455 1315,1535 3945,1535
GND on Bottom Layer "SHUNT_LOW_SIDE" (solid, pour order 93): 3020,1630 cw(c3020,1700) 2950,1700 2950,1820 ccw(c2842.5,1820) 2842.5,1927.5 cw(c2837.5,1960) 2805,1955 2805,2085 cw(c2835,2085) 2835,2115 3005,2115 cw(c2992.5,2007.5) 3100,1995 3100,1705 cw(c3025,1705) 3025,1630
Current_Shunt_H on Bottom Layer "SHUNT_HIGH_SIDE" (solid, pour order 81): 2635,2095 ccw(c2615,2095) 2632.32,2105 2435,2105 ccw(c2435,2070) 2400,2070 2400,1925 2605,1925 ccw(c2605,1955) 2635,1955
GND on Bottom Layer "NONET_L01_P-001" (solid, pour order 79): 1876.03,4590.44 1876.03,3570.44 3406.03,3570.44 3406.03,4590.44
no net on Bottom Layer "NONET_L01_P-001" (solid, pour order 91): 3260,2620
Current_Shunt_H on Bottom Layer "NEG_BUS" (solid, pour order 80): 2480,2960 ccw(c2435,2960) 2435,3005 2140,3005 ccw(c2140,2960) 2095,2960 2095,2925 2055,2925 2055,2835 2095,2835 2095,2680 2060,2680 2060,2590 2095,2590 2095,2445 2058.84,2445 2058.84,2350 2095,2350 2095,1995 ccw(c2165,1995) 2165,1925 2410,1925 ccw(c2410,1995) 2480,1995
Phase_C_Out on Bottom Layer "PHASE_C_OUT_L02_P074" (solid, pour order 74): 1493.78,2257.79 cw(c1493.78,2317.79) 1433.78,2317.79 1433.78,2422.79 cw(c1493.78,2422.79) 1493.78,2482.79 2018.78,2482.79 cw(c2018.78,2472.79) 2028.78,2472.79 2028.78,2267.79 cw(c2018.78,2267.79) 2018.78,2257.79
Phase_B_Out on Bottom Layer "PHASE_B_OUT_L02_P073" (solid, pour order 73): 1493.78,2502.79 cw(c1493.78,2562.79) 1433.78,2562.79 1433.78,2667.79 cw(c1493.78,2667.79) 1493.78,2727.79 2018.78,2727.79 cw(c2018.78,2717.79) 2028.78,2717.79 2028.78,2512.79 cw(c2018.78,2512.79) 2018.78,2502.79
Phase_A_Out on Bottom Layer "PHASE_A_OUT_L02_P072" (solid, pour order 72): 1495,2750 cw(c1495,2810) 1435,2810 1435,2915 cw(c1495,2915) 1495,2975 2020,2975 cw(c2020,2965) 2030,2965 2030,2760 cw(c2020,2760) 2020,2750
no net on Bottom Layer "NONET_L02_P050" (solid, pour order 50): 2480,2180
no net on Bottom Layer "NONET_L02_P048" (solid, pour order 48): 2480,2180
no net on Bottom Layer "NONET_L02_P020" (solid, pour order 20): 1260,1705
no net on Bottom Layer "NONET_L02_P019" (solid, pour order 19): 1317.05,1706.85
no net on Bottom Layer "NONET_L02_P018" (solid, pour order 18): 1970,2240
no net on Top Solder "PHASE_B_OUT_L01_P035" (solid, pour order 35): 1491.43,2502.41 cw(c1491.43,2562.41) 1431.43,2562.41 1431.43,2667.41 cw(c1491.43,2667.41) 1491.43,2727.41 2016.43,2727.41 cw(c2018.72,2716.82) 2029.31,2719.1 2029.31,2670 1915,2670 1915,2553.94 2029.31,2553.94 2029.31,2512.05 cw(c2018.06,2513.66) 2016.43,2502.41
no net on Top Solder (solid): 2095,2292.5 2267.5,2292.5 2505,2292.5 cw(c2505,2267.5) 2530,2267.5 cw(c2505,2267.5) 2530,2267.5 2530,1900 2905,1900 2905,2265 2905,3030 ccw(c2855,3030) 2855,3080 2580,3080 ccw(c2580,3030) 2530,3030 2530,2905 cw(c2505,2905) 2530,2905 cw(c2505,2905) 2505,2880 cw(c2505,2905) 2505,2880 2095,2880 2095,2780 2505,2780 cw(c2505,2755) 2505,2780 cw(c2505,2755) 2530,2755 cw(c2505,2755) 2530,2755 2530,2655 cw(c2510,2655) 2510,2635 2095,2635 2095,2530 2505,2530 cw(c2505,2505) 2505,2530 cw(c2505,2505) 2530,2505 cw(c2505,2505) 2530,2505 2530,2425 cw(c2505,2425) 2530,2425 cw(c2505,2425) 2505,2400 cw(c2505,2425) 2505,2400 2095,2400
no net on Top Solder "PHASE_C_OUT_L01_P036" (solid, pour order 36): 1491.43,2257.41 cw(c1491.43,2317.41) 1431.43,2317.41 1431.43,2422.41 cw(c1491.43,2422.41) 1491.43,2482.41 2021.05,2482.41 cw(c2021.05,2474.51) 2028.95,2474.51 2028.95,2432.11 1915.29,2432.11 1915.29,2315 2028.95,2315 2028.95,2266.09 cw(c2020.83,2265.86) 2021.05,2257.74
no net on Top Solder "PHASE_A_OUT_L01_P034" (solid, pour order 34): 1495,2750 cw(c1495,2810) 1435,2810 1435,2915 cw(c1495,2915) 1495,2975 2020,2975 cw(c2020,2965) 2030,2965 2030,2919.19 1910,2919.19 1910,2795 2030,2795 2030,2760 cw(c2020,2760) 2020,2750
no net on Bottom Solder "NONET_L01_P-001" (solid): 2095,2960 cw(c2140,2960) 2140,3005 2435,3005 cw(c2435,2960) 2480,2960 2480,2185 2095,2185
no net on Bottom Solder "PHASE_C_OUT_L02_P033" (solid, pour order 33): 1493.78,2257.79 cw(c1493.77,2317.79) 1433.78,2317.79 1433.78,2422.79 cw(c1493.77,2422.79) 1493.78,2482.79 2018.78,2482.79 cw(c2018.78,2472.79) 2028.78,2472.79 2028.78,2435 1912.06,2435 1912.06,2314.27 2028.78,2313.41 2028.78,2267.79 cw(c2018.78,2267.79) 2018.78,2257.79
no net on Bottom Solder "PHASE_B_OUT_L02_P032" (solid, pour order 32): 1493.78,2502.79 cw(c1493.77,2562.79) 1433.78,2562.79 1433.78,2667.79 cw(c1493.77,2667.79) 1493.78,2727.79 2018.78,2727.79 cw(c2018.78,2717.79) 2028.78,2717.79 2028.78,2675 1911.25,2675 1911.25,2550 2028.78,2550 2028.78,2512.79 cw(c2018.78,2512.79) 2018.78,2502.79
no net on Bottom Solder "PHASE_A_OUT_L02_P031" (solid, pour order 31): 1495,2750 cw(c1495,2810) 1435,2810 1435,2915 cw(c1495,2915) 1495,2975 2020,2975 cw(c2020,2965) 2030,2965 2030,2917.65 1913.43,2917.65 1913.43,2795 2030,2795 2030,2760 cw(c2020,2760) 2020,2750

## Other copper
Top Layer:
  region: 1497.05,2811.85
Bottom Layer:
  region: 1980,3305
  region: 1895,3265

## Silkscreen, mask and mechanical layers (free items; w line width, h text height)
Top Overlay:
  circle w10: c3256.03,4025.44 r35.36
  circle w10: c3256.03,4160.44 r35.36
  lines w10: 3096.03,4025.44 3221.03,4025.44 ; 3096.03,4160.44 3216.03,4160.44 ; 3126.03,3945.44 3391.03,3945.44 3391.03,4230.44 3126.03,4230.44 3126.03,3945.44
  text "1V8" at 2126.03,4200.44 h50
  text "CAN_H" at 2786.03,4130.44 h60
  text "3V3" at 2116.03,4090.44 h50
  text "CAN_L" at 2786.03,3995.44 h60
  text "5V" at 2161.03,3985.44 h50
  text "ESC Development Board / Rev A / AUVIC 2020 / Poorna Chander Kalidas" at 1545,1550 h50
Bottom Overlay:
  lines w10: 2066.03,3815.44 2116.03,3765.44 2351.03,3765.44 ; 2066.03,3930.44 2086.03,3930.44 2151.03,3865.44 2346.03,3865.44 ; 2066.03,4005.44 2141.03,3930.44 2291.03,3930.44 ; 2066.03,4245.44 2091.03,4270.44 2096.03,4270.44 2471.03,4270.44 ; 2066.03,4540.44 2196.03,4540.44 ; 2071.03,4430.44 2261.03,4430.44 ; 2076.03,3630.44 2226.03,3630.44 ; 2076.03,4325.44 2251.03,4325.44 ; 2211.03,3725.44 2356.03,3725.44 ; 2211.03,3825.44 2346.03,3825.44 ; 2211.03,4380.44 2256.03,4380.44 ; 2216.03,4475.44 2266.03,4475.44
  text "CAN1_ERR" at 2671.03,4510.44 h60
  text "CAN1_TX" at 2671.03,4415.44 h60
  text "CAN1_RX" at 2666.03,4325.44 h60
  text "CAN1_STBY" at 3011.03,4215.44 h60
  text "Jetson CAN Transciever / Rev A, AUVIC 2020 / Poorna Chander Kalidas" at 3370,3985 h40
  text "CAN0_ERR" at 2771.03,3900.44 h60
  text "CAN0_TX" at 2771.03,3805.44 h60
  text "CAN0_RX" at 2771.03,3705.44 h60
  text "CAN0_WAKE" at 2766.03,3605.44 h60
  text "Fault N" at 3825,2945 h50
  text "SPD" at 3630,2850 h50
  text "PWM" at 3635,2765 h50
  text "SDO" at 3635,2605 h50
  text "SCK" at 3635,2510 h50
  text "STRn" at 3680,2410 h50
  text "SDI" at 3620,2300 h50
  text "4.5V to 30V" at 2705,1650 h50
  text "+" at 2708.33,1605 h50 r90
  text "GND" at 3150,1540 h50 r270
Mechanical 1:
  lines w10: 1265.51,1495 3975,1495 3975,4630.92 1265.51,4630.92 1265.51,1495